# Altium PCB Coil_v3r1.PcbDoc (part 4 of 5)
Units mm, origin at the board's own origin, x right, y up, seen from the top; angles counter-clockwise.
Board outline 72 x 72 mm, 4 copper layers (Top Layer, Signal Layer 1, Signal Layer 2, Bottom Layer), stack 0.778 mm thick; 2 components, 0 nets, 15 pads, 374 vias.
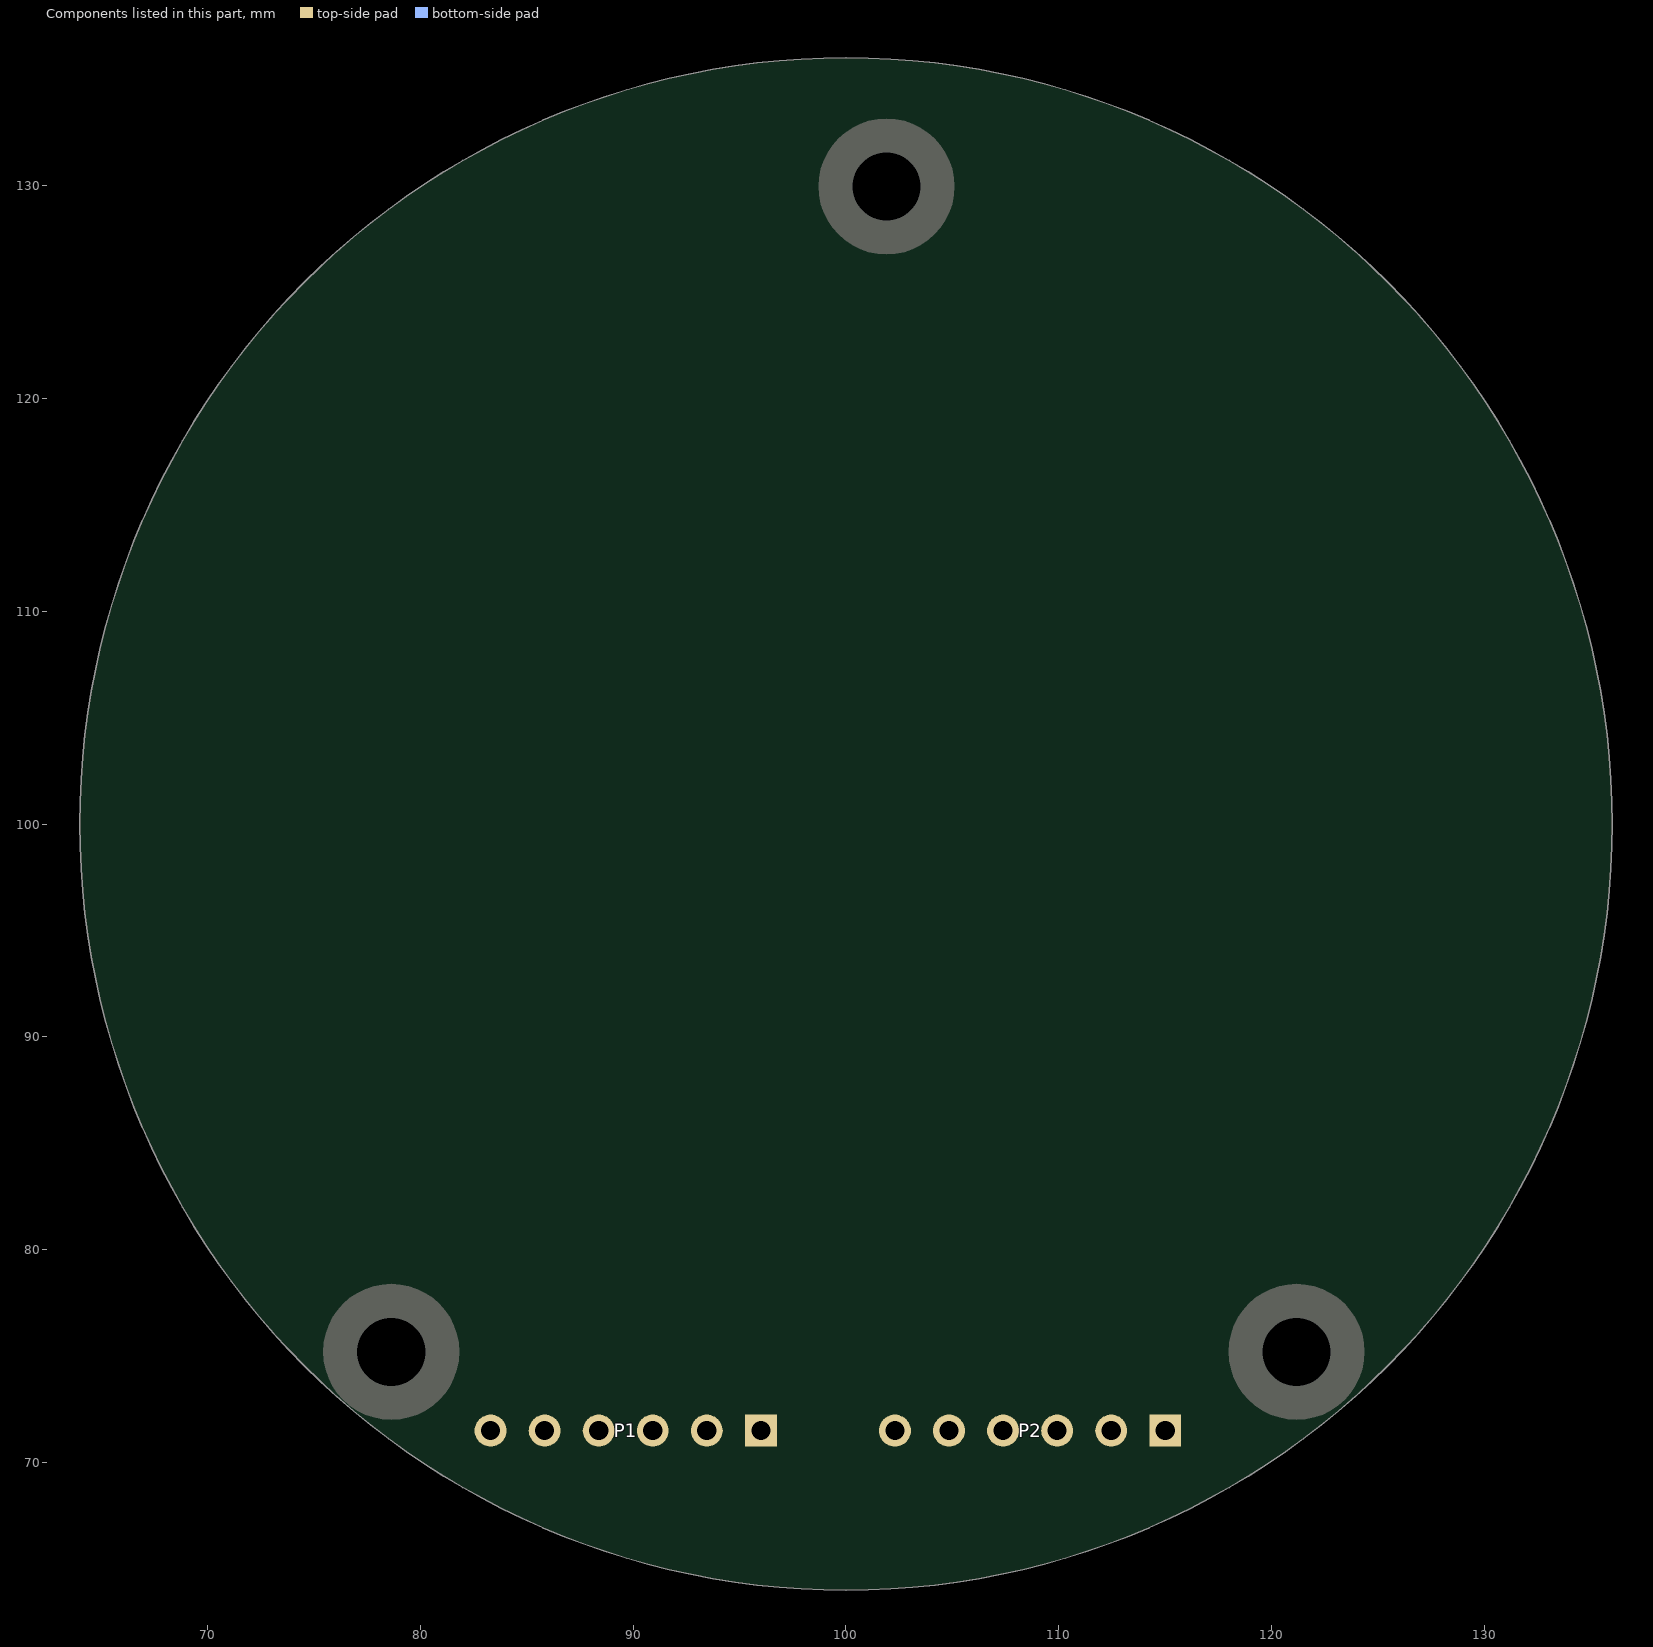
[diagram p6: the components of this part, seen from the top]

## Via types
v1: diameter 0.406, hole 0.305, Top Layer to Bottom Layer, 374 vias

## Nets (pads, with @x,y where several pads share a name; then routed paths per layer and width w, separated by ;. In a path a pad name is that pad's centre, name@x,y a point inside that pad or via, vN(x,y) a via of type N, cw(c..) or ccw(c..) an arc to the next point about the centre after c; other vN are vias at no path point) (continued)
copper on no net: (continued)
  Signal Layer 2 w0.1: v1(76.079,98.825) 76.105,98.669 76.167,98.516 76.264,98.366 76.396,98.22 76.561,98.078 76.757,97.941 76.982,97.809 77.235,97.683 77.511,97.562 77.809,97.447 78.125,97.338 78.455,97.235 78.797,97.138 79.146,97.046 79.499,96.959 79.853,96.877 80.203,96.798 80.546,96.723 80.878,96.65 81.196,96.579 81.497,96.508 81.778,96.437 82.036,96.366 82.268,96.291 82.472,96.214 82.647,96.133 82.79,96.047 82.902,95.954 82.98,95.855 v1(83.024,95.748) ; v1(76.079,101.175) 76.089,101.018 76.136,100.859 76.218,100.701 76.335,100.542 76.485,100.385 76.667,100.229 76.878,100.076 77.117,99.925 77.38,99.778 77.665,99.635 77.969,99.495 78.288,99.36 78.618,99.23 78.957,99.104 79.3,98.983 79.644,98.866 79.984,98.754 80.318,98.645 80.642,98.54 80.951,98.438 81.244,98.338 81.516,98.241 81.766,98.144 81.99,98.047 82.185,97.951 82.351,97.853 82.486,97.752 82.587,97.65 82.655,97.543 v1(82.689,97.432) ; v1(76.309,96.486) 76.35,96.334 76.427,96.187 76.538,96.048 76.684,95.915 76.862,95.79 77.071,95.673 77.308,95.563 77.571,95.462 77.858,95.369 78.166,95.284 78.491,95.207 78.83,95.137 79.179,95.073 79.536,95.016 79.896,94.964 80.256,94.917 80.612,94.873 80.961,94.832 81.298,94.792 81.622,94.752 81.929,94.711 82.215,94.668 82.478,94.622 82.717,94.571 82.928,94.515 83.109,94.451 83.261,94.379 83.381,94.298 83.468,94.207 v1(83.523,94.104) ; v1(76.309,103.514) 76.304,103.357 76.335,103.194 76.401,103.028 76.502,102.859 76.636,102.688 76.802,102.515 76.997,102.342 77.22,102.168 77.468,101.996 77.737,101.825 78.026,101.657 78.33,101.492 78.646,101.329 78.97,101.171 79.3,101.017 79.631,100.867 79.959,100.722 80.28,100.581 80.592,100.445 80.89,100.313 81.172,100.185 81.433,100.061 81.672,99.94 81.885,99.822 82.07,99.707 82.226,99.593 82.35,99.48 82.441,99.368 82.498,99.255 v1(82.521,99.141) ; v1(76.768,94.181) 76.823,94.033 76.914,93.895 77.039,93.767 77.197,93.649 77.386,93.542 77.605,93.446 77.852,93.361 78.124,93.286 78.419,93.221 78.733,93.167 79.064,93.122 79.408,93.085 79.763,93.056 80.123,93.034 80.486,93.018 80.849,93.006 81.208,92.997 81.559,92.99 81.899,92.984 82.225,92.976 82.534,92.965 82.823,92.951 83.09,92.931 83.332,92.903 83.547,92.868 83.735,92.822 83.892,92.765 84.02,92.696 84.116,92.614 v1(84.18,92.518) ; v1(76.768,105.819) 76.747,105.663 76.762,105.499 76.812,105.327 76.896,105.149 77.012,104.965 77.16,104.777 77.338,104.585 77.542,104.391 77.772,104.195 78.023,103.999 78.294,103.803 78.58,103.608 78.879,103.416 79.187,103.227 79.499,103.041 79.814,102.859 80.126,102.683 80.432,102.511 80.729,102.345 81.013,102.184 81.28,102.029 81.528,101.88 81.754,101.737 81.955,101.599 82.128,101.465 82.272,101.337 82.384,101.213 82.463,101.092 82.509,100.974 v1(82.521,100.859) ; v1(77.45,91.931) 77.52,91.79 77.624,91.662 77.76,91.546 77.929,91.445 78.128,91.357 78.355,91.283 78.61,91.222 78.888,91.174 79.187,91.139 79.505,91.115 79.839,91.103 80.185,91.1 80.541,91.106 80.902,91.12 81.265,91.139 81.627,91.163 81.985,91.189 82.335,91.216 82.674,91.243 82.999,91.267 83.308,91.287 83.597,91.301 83.864,91.307 84.108,91.304 84.326,91.289 84.517,91.262 84.679,91.221 84.812,91.165 84.916,91.093 v1(84.99,91.003) ; v1(77.45,108.069) 77.414,107.915 77.413,107.75 77.446,107.574 77.511,107.388 77.609,107.194 77.738,106.992 77.896,106.784 78.081,106.571 78.29,106.354 78.521,106.134 78.771,105.912 79.037,105.691 79.316,105.47 79.603,105.251 79.896,105.036 80.191,104.824 80.484,104.618 80.772,104.417 81.051,104.222 81.318,104.035 81.569,103.855 81.802,103.682 82.012,103.517 82.198,103.36 82.358,103.21 82.488,103.068 82.588,102.933 82.655,102.805 82.689,102.684 v1(82.689,102.568) ; v1(78.349,89.76) 78.433,89.626 78.549,89.508 78.696,89.407 78.874,89.323 79.08,89.255 79.314,89.203 79.573,89.167 79.854,89.147 80.156,89.141 80.475,89.149 80.808,89.17 81.153,89.201 81.506,89.242 81.864,89.29 82.224,89.345 82.582,89.404 82.935,89.466 83.281,89.527 83.616,89.587 83.937,89.643 84.242,89.693 84.528,89.735 84.794,89.767 85.037,89.788 85.255,89.795 85.448,89.787 85.613,89.762 85.751,89.719 85.862,89.657 v1(85.944,89.575) ; v1(78.349,110.24) 78.299,110.091 78.281,109.926 78.297,109.748 78.344,109.557 78.422,109.354 78.531,109.141 78.667,108.918 78.83,108.688 79.017,108.451 79.226,108.209 79.453,107.965 79.696,107.718 79.951,107.471 80.216,107.225 80.486,106.982 80.759,106.743 81.031,106.508 81.298,106.28 81.557,106.059 81.804,105.847 82.036,105.643 82.25,105.448 82.444,105.263 82.613,105.088 82.757,104.924 82.873,104.77 82.959,104.626 83.013,104.492 83.036,104.368 v1(83.024,104.252) ; v1(79.457,87.687) 79.554,87.562 79.68,87.456 79.837,87.37 80.022,87.303 80.234,87.256 80.472,87.227 80.733,87.217 81.015,87.225 81.316,87.249 81.633,87.288 81.962,87.341 82.302,87.406 82.65,87.481 83.001,87.564 83.354,87.654 83.704,87.748 84.05,87.844 84.388,87.939 84.715,88.031 85.029,88.119 85.328,88.198 85.609,88.268 85.87,88.326 86.11,88.37 86.326,88.399 86.519,88.409 86.686,88.401 86.828,88.372 86.944,88.321 v1(87.033,88.248) ; v1(79.457,112.313) 79.392,112.169 79.359,112.007 79.357,111.829 79.385,111.634 79.443,111.424 79.53,111.201 79.644,110.966 79.784,110.721 79.947,110.467 80.13,110.206 80.332,109.94 80.55,109.671 80.78,109.4 81.019,109.13 81.265,108.861 81.513,108.596 81.76,108.336 82.004,108.083 82.239,107.838 82.464,107.602 82.675,107.376 82.87,107.161 83.044,106.959 83.196,106.768 83.323,106.59 83.423,106.426 83.494,106.274 83.536,106.135 83.545,106.009 v1(83.523,105.896) ; v1(80.763,85.733) 80.871,85.618 81.008,85.525 81.172,85.455 81.363,85.406 81.579,85.38 81.818,85.375 82.079,85.39 82.359,85.425 82.656,85.479 82.967,85.549 83.29,85.634 83.622,85.731 83.96,85.84 84.302,85.958 84.644,86.082 84.984,86.21 85.318,86.339 85.645,86.467 85.962,86.591 86.266,86.708 86.556,86.817 86.828,86.914 87.082,86.998 87.316,87.065 87.529,87.114 87.72,87.144 87.887,87.152 88.031,87.137 88.151,87.098 v1(88.248,87.033) ; v1(80.763,114.267) 80.684,114.13 80.635,113.973 80.615,113.795 80.625,113.598 80.662,113.384 80.727,113.154 80.817,112.909 80.932,112.651 81.069,112.382 81.226,112.105 81.402,111.82 81.592,111.531 81.794,111.239 82.006,110.946 82.224,110.655 82.444,110.367 82.665,110.084 82.882,109.808 83.093,109.541 83.294,109.284 83.482,109.039 83.654,108.806 83.808,108.587 83.94,108.383 84.049,108.193 84.133,108.02 84.189,107.862 84.216,107.72 84.214,107.593 v1(84.18,107.482) ; v1(82.254,83.916) 82.373,83.812 82.518,83.733 82.688,83.679 82.883,83.65 83.1,83.645 83.339,83.663 83.597,83.704 83.872,83.766 84.163,83.849 84.466,83.949 84.779,84.065 85.099,84.195 85.425,84.336 85.754,84.487 86.082,84.644 86.407,84.804 86.728,84.966 87.041,85.125 87.344,85.279 87.635,85.426 87.912,85.563 88.174,85.686 88.419,85.794 88.645,85.884 88.852,85.954 89.039,86.002 89.205,86.026 89.349,86.025 89.473,85.998 v1(89.575,85.944) ; v1(82.254,116.084) 82.163,115.956 82.098,115.804 82.061,115.629 82.051,115.432 82.067,115.215 82.109,114.979 82.175,114.727 82.264,114.459 82.374,114.178 82.503,113.886 82.65,113.586 82.81,113.28 82.983,112.969 83.165,112.657 83.354,112.346 83.545,112.038 83.737,111.735 83.926,111.439 84.11,111.152 84.284,110.877 84.447,110.614 84.596,110.366 84.727,110.133 84.839,109.916 84.929,109.717 84.995,109.536 85.036,109.374 85.049,109.23 85.034,109.104 v1(84.99,108.997) ; v1(83.916,82.254) 84.044,82.163 84.196,82.098 84.371,82.061 84.568,82.051 84.785,82.067 85.021,82.109 85.273,82.175 85.541,82.264 85.822,82.374 86.114,82.503 86.414,82.65 86.72,82.81 87.031,82.983 87.343,83.165 87.654,83.354 87.962,83.545 88.265,83.737 88.561,83.926 88.848,84.11 89.123,84.284 89.386,84.447 89.634,84.596 89.867,84.727 90.084,84.839 90.283,84.929 90.464,84.995 90.626,85.036 90.77,85.049 90.896,85.034 v1(91.003,84.99) ; v1(83.916,117.746) 83.812,117.627 83.733,117.482 83.679,117.312 83.65,117.117 83.645,116.9 83.663,116.661 83.704,116.403 83.766,116.128 83.849,115.837 83.949,115.534 84.065,115.221 84.195,114.901 84.336,114.575 84.487,114.246 84.644,113.918 84.804,113.593 84.966,113.272 85.125,112.959 85.279,112.656 85.426,112.365 85.563,112.088 85.686,111.826 85.794,111.581 85.884,111.355 85.954,111.148 86.002,110.961 86.026,110.795 86.025,110.651 85.998,110.527 v1(85.944,110.425) ; v1(85.733,80.763) 85.87,80.684 86.027,80.635 86.205,80.615 86.402,80.625 86.616,80.662 86.846,80.727 87.091,80.817 87.349,80.932 87.618,81.069 87.895,81.226 88.18,81.402 88.469,81.592 88.761,81.794 89.054,82.006 89.345,82.224 89.633,82.444 89.916,82.665 90.192,82.882 90.459,83.093 90.716,83.294 90.961,83.482 91.194,83.654 91.413,83.808 91.617,83.94 91.807,84.049 91.98,84.133 92.138,84.189 92.28,84.216 92.407,84.214 v1(92.518,84.18) ; v1(85.733,119.237) 85.618,119.129 85.525,118.992 85.455,118.828 85.406,118.637 85.38,118.421 85.375,118.182 85.39,117.921 85.425,117.641 85.479,117.344 85.549,117.033 85.634,116.71 85.731,116.378 85.84,116.04 85.958,115.698 86.082,115.356 86.21,115.016 86.339,114.682 86.467,114.355 86.591,114.038 86.708,113.734 86.817,113.444 86.914,113.172 86.998,112.918 87.065,112.684 87.114,112.471 87.144,112.28 87.152,112.113 87.137,111.969 87.098,111.849 v1(87.033,111.752) ; 85.84,71.5 85.84,73.113 86.768,74.041 97.989,74.041 98.815,74.867 98.815,76.079 ; v1(86.269,99.28) 86.291,99.186 86.348,99.093 86.439,99.004 86.564,98.919 86.719,98.838 86.905,98.762 87.119,98.692 87.358,98.627 87.621,98.568 87.903,98.515 88.203,98.468 88.517,98.427 88.841,98.392 89.171,98.362 89.506,98.338 89.84,98.318 90.17,98.302 90.493,98.289 90.806,98.279 91.104,98.271 91.385,98.263 91.646,98.255 91.885,98.245 92.098,98.234 92.284,98.219 92.441,98.199 92.568,98.175 92.663,98.143 92.726,98.105 v1(92.756,98.059) ; v1(86.269,100.72) 86.281,100.623 86.328,100.525 86.41,100.427 86.524,100.329 86.671,100.233 86.848,100.138 87.053,100.045 87.284,99.956 87.539,99.87 87.814,99.787 88.107,99.709 88.415,99.636 88.734,99.567 89.06,99.503 89.39,99.444 89.72,99.389 90.047,99.339 90.367,99.293 90.676,99.25 90.972,99.21 91.251,99.173 91.51,99.138 91.746,99.103 91.957,99.069 92.14,99.035 92.295,98.999 92.418,98.961 92.509,98.921 92.567,98.876 v1(92.592,98.827) ; v1(86.419,97.849) 86.452,97.757 86.518,97.671 86.618,97.592 86.75,97.52 86.914,97.456 87.106,97.4 87.326,97.352 87.571,97.313 87.838,97.282 88.125,97.258 88.428,97.243 88.744,97.235 89.07,97.234 89.402,97.239 89.737,97.25 90.071,97.265 90.402,97.284 90.724,97.305 91.036,97.328 91.333,97.35 91.614,97.372 91.875,97.391 92.113,97.407 92.326,97.417 92.513,97.422 92.671,97.419 92.799,97.408 92.897,97.387 92.964,97.355 v1(92.998,97.312) ; v1(86.419,102.151) 86.422,102.054 86.458,101.951 86.529,101.845 86.632,101.736 86.768,101.625 86.934,101.512 87.128,101.398 87.349,101.285 87.593,101.173 87.859,101.062 88.142,100.954 88.44,100.849 88.75,100.747 89.068,100.65 89.39,100.556 89.712,100.467 90.032,100.383 90.345,100.303 90.649,100.229 90.939,100.158 91.212,100.092 91.466,100.03 91.697,99.971 91.904,99.915 92.083,99.862 92.232,99.81 92.351,99.76 92.437,99.709 92.491,99.659 v1(92.51,99.607) ; v1(86.719,96.441) 86.76,96.353 86.835,96.275 86.943,96.207 87.082,96.149 87.251,96.102 87.449,96.067 87.672,96.042 87.92,96.028 88.189,96.025 88.476,96.032 88.779,96.049 89.095,96.074 89.419,96.107 89.749,96.147 90.081,96.192 90.412,96.242 90.738,96.296 91.057,96.35 91.364,96.405 91.658,96.459 91.935,96.51 92.192,96.556 92.427,96.597 92.638,96.629 92.823,96.653 92.981,96.667 93.11,96.669 93.209,96.659 93.279,96.634 v1(93.317,96.595) ; v1(86.719,103.559) 86.711,103.462 86.736,103.356 86.795,103.243 86.887,103.124 87.01,102.999 87.164,102.869 87.345,102.736 87.553,102.6 87.784,102.463 88.036,102.325 88.307,102.188 88.593,102.053 88.89,101.919 89.195,101.789 89.506,101.662 89.817,101.54 90.127,101.423 90.43,101.311 90.724,101.205 91.005,101.104 91.27,101.01 91.516,100.922 91.74,100.839 91.939,100.762 92.111,100.69 92.255,100.623 92.368,100.56 92.448,100.502 92.496,100.446 v1(92.51,100.393) ; v1(87.163,95.072) 87.214,94.989 87.297,94.919 87.411,94.862 87.555,94.82 87.728,94.791 87.929,94.776 88.154,94.775 88.401,94.787 88.669,94.812 88.954,94.849 89.254,94.897 89.565,94.955 89.884,95.022 90.208,95.096 90.533,95.176 90.857,95.261 91.176,95.348 91.487,95.435 91.787,95.522 92.074,95.606 92.344,95.686 92.595,95.759 92.824,95.824 93.031,95.878 93.212,95.922 93.368,95.952 93.496,95.967 93.596,95.967 93.667,95.95 v1(93.71,95.915) ; v1(87.163,104.928) 87.145,104.832 87.16,104.724 87.207,104.606 87.286,104.477 87.395,104.34 87.534,104.195 87.7,104.044 87.893,103.887 88.108,103.727 88.345,103.563 88.6,103.399 88.87,103.234 89.151,103.07 89.442,102.908 89.737,102.75 90.034,102.596 90.33,102.447 90.62,102.304 90.901,102.168 91.17,102.039 91.423,101.917 91.659,101.803 91.873,101.698 92.063,101.6 92.227,101.511 92.362,101.429 92.468,101.355 92.542,101.288 92.584,101.228 v1(92.592,101.173) ; v1(87.687,79.457) 87.831,79.392 87.993,79.359 88.171,79.357 88.366,79.385 88.576,79.443 88.799,79.53 89.034,79.644 89.279,79.784 89.533,79.947 89.794,80.13 90.06,80.332 90.329,80.55 90.6,80.78 90.87,81.019 91.139,81.265 91.404,81.513 91.664,81.76 91.917,82.004 92.162,82.239 92.398,82.464 92.624,82.675 92.839,82.87 93.041,83.044 93.232,83.196 93.41,83.323 93.574,83.423 93.726,83.494 93.865,83.536 93.991,83.545 v1(94.104,83.523) ; v1(87.687,120.543) 87.562,120.446 87.456,120.32 87.37,120.163 87.303,119.978 87.256,119.766 87.227,119.528 87.217,119.267 87.225,118.985 87.249,118.684 87.288,118.367 87.341,118.038 87.406,117.698 87.481,117.35 87.564,116.999 87.654,116.646 87.748,116.296 87.844,115.95 87.939,115.612 88.031,115.285 88.119,114.971 88.198,114.672 88.268,114.391 88.326,114.13 88.37,113.89 88.399,113.674 88.409,113.481 88.401,113.314 88.372,113.172 88.321,113.056 v1(88.248,112.967) ; v1(87.749,93.758) 87.808,93.68 87.897,93.619 88.017,93.575 88.165,93.547 88.34,93.537 88.541,93.543 88.765,93.566 89.01,93.604 89.274,93.656 89.553,93.723 89.846,93.802 90.149,93.892 90.459,93.992 90.774,94.1 91.089,94.213 91.402,94.331 91.711,94.451 92.011,94.571 92.3,94.688 92.576,94.802 92.837,94.909 93.078,95.008 93.3,95.096 93.5,95.172 93.676,95.234 93.827,95.281 93.953,95.309 94.052,95.32 94.125,95.31 v1(94.171,95.28) ; v1(87.749,106.242) 87.721,106.149 87.724,106.041 87.758,105.918 87.823,105.782 87.918,105.634 88.041,105.475 88.19,105.307 88.365,105.131 88.563,104.949 88.781,104.762 89.017,104.572 89.269,104.379 89.532,104.187 89.803,103.996 90.081,103.808 90.36,103.623 90.638,103.444 90.912,103.272 91.177,103.107 91.431,102.95 91.671,102.803 91.893,102.665 92.095,102.538 92.274,102.421 92.427,102.315 92.554,102.22 92.651,102.135 92.718,102.061 92.753,101.996 v1(92.756,101.941) ; 88.38,71.5 90.03,69.85 97.939,69.85 101.185,73.096 101.185,76.079 ; v1(88.468,92.511) 88.535,92.44 88.631,92.389 88.754,92.357 88.904,92.346 89.08,92.353 89.278,92.381 89.499,92.426 89.739,92.49 89.995,92.57 90.267,92.665 90.55,92.775 90.842,92.896 91.14,93.028 91.441,93.167 91.743,93.313 92.042,93.463 92.336,93.615 92.622,93.765 92.898,93.913 93.16,94.054 93.408,94.188 93.638,94.312 93.849,94.423 94.04,94.519 94.209,94.599 94.354,94.661 94.476,94.703 94.574,94.724 94.648,94.722 v1(94.697,94.697) ; v1(88.468,107.489) 88.431,107.399 88.423,107.291 88.444,107.165 88.494,107.023 88.573,106.866 88.679,106.696 88.81,106.513 88.965,106.32 89.143,106.118 89.341,105.909 89.555,105.695 89.785,105.477 90.027,105.258 90.277,105.04 90.533,104.824 90.792,104.611 91.05,104.404 91.304,104.204 91.55,104.012 91.787,103.83 92.009,103.658 92.216,103.498 92.403,103.351 92.569,103.216 92.711,103.094 92.826,102.986 92.914,102.892 92.973,102.811 93.001,102.743 v1(92.998,102.688) ; v1(89.314,91.347) 89.388,91.283 89.489,91.242 89.615,91.224 89.765,91.228 89.939,91.254 90.134,91.302 90.348,91.37 90.58,91.458 90.827,91.565 91.087,91.688 91.357,91.826 91.634,91.978 91.917,92.14 92.202,92.31 92.487,92.487 92.769,92.667 93.046,92.849 93.314,93.028 93.573,93.204 93.819,93.372 94.051,93.531 94.268,93.678 94.466,93.811 94.645,93.926 94.805,94.024 94.943,94.1 95.06,94.155 95.155,94.185 95.229,94.191 v1(95.28,94.171) ; v1(89.314,108.653) 89.267,108.568 89.248,108.461 89.256,108.334 89.291,108.187 89.353,108.023 89.44,107.842 89.552,107.647 89.686,107.438 89.842,107.219 90.017,106.99 90.208,106.755 90.414,106.515 90.631,106.272 90.857,106.029 91.089,105.787 91.324,105.548 91.559,105.316 91.791,105.09 92.016,104.873 92.232,104.668 92.436,104.474 92.624,104.293 92.795,104.126 92.946,103.975 93.074,103.839 93.178,103.72 93.255,103.616 93.305,103.53 93.326,103.459 v1(93.317,103.405) ; v1(89.575,114.056) 89.657,114.138 89.719,114.249 89.762,114.387 89.787,114.552 89.795,114.745 89.788,114.963 89.767,115.206 89.735,115.472 89.693,115.758 89.643,116.063 89.587,116.384 89.527,116.719 89.466,117.065 89.404,117.418 89.345,117.776 89.29,118.136 89.242,118.494 89.201,118.847 89.17,119.192 89.149,119.525 89.141,119.844 89.147,120.146 89.167,120.427 89.203,120.686 89.255,120.92 89.323,121.126 89.407,121.304 89.508,121.451 89.626,121.567 v1(89.76,121.651) ; v1(89.76,78.349) 89.909,78.299 90.074,78.281 90.252,78.297 90.443,78.344 90.646,78.422 90.859,78.531 91.082,78.667 91.312,78.83 91.549,79.017 91.791,79.226 92.035,79.453 92.282,79.696 92.529,79.951 92.775,80.216 93.018,80.486 93.257,80.759 93.492,81.031 93.72,81.298 93.941,81.557 94.153,81.804 94.357,82.036 94.552,82.25 94.737,82.444 94.912,82.613 95.076,82.757 95.23,82.873 95.374,82.959 95.508,83.013 95.632,83.036 v1(95.748,83.024) ; v1(90.277,90.277) 90.357,90.222 90.462,90.191 90.589,90.186 90.738,90.206 90.908,90.25 91.097,90.318 91.303,90.409 91.524,90.521 91.759,90.652 92.004,90.802 92.258,90.968 92.519,91.147 92.783,91.338 93.049,91.537 93.313,91.743 93.575,91.952 93.831,92.161 94.08,92.368 94.319,92.569 94.546,92.762 94.76,92.945 94.96,93.113 95.143,93.266 95.31,93.4 95.458,93.513 95.588,93.604 95.698,93.67 95.79,93.711 95.862,93.724 v1(95.915,93.71) ; v1(90.277,109.723) 90.222,109.643 90.191,109.538 90.186,109.411 90.206,109.262 90.25,109.092 90.318,108.903 90.409,108.697 90.521,108.476 90.652,108.241 90.802,107.996 90.968,107.742 91.147,107.481 91.338,107.217 91.537,106.951 91.743,106.687 91.952,106.425 92.161,106.169 92.368,105.92 92.569,105.681 92.762,105.454 92.945,105.24 93.113,105.04 93.266,104.857 93.4,104.69 93.513,104.542 93.604,104.412 93.67,104.302 93.711,104.21 93.724,104.138 v1(93.71,104.085) ; v1(91.003,115.01) 91.093,115.084 91.165,115.188 91.221,115.321 91.262,115.483 91.289,115.674 91.304,115.892 91.307,116.136 91.301,116.403 91.287,116.692 91.267,117.001 91.243,117.326 91.216,117.665 91.189,118.015 91.163,118.373 91.139,118.735 91.12,119.098 91.106,119.459 91.1,119.815 91.103,120.161 91.115,120.495 91.139,120.813 91.174,121.112 91.222,121.39 91.283,121.645 91.357,121.872 91.445,122.071 91.546,122.24 91.662,122.376 91.79,122.48 v1(91.931,122.55) ; v1(91.347,89.314) 91.432,89.267 91.539,89.248 91.666,89.256 91.813,89.291 91.977,89.353 92.158,89.44 92.353,89.552 92.562,89.686 92.781,89.842 93.01,90.017 93.245,90.208 93.485,90.414 93.728,90.631 93.971,90.857 94.213,91.089 94.452,91.324 94.684,91.559 94.91,91.791 95.127,92.016 95.332,92.232 95.526,92.436 95.707,92.624 95.874,92.795 96.025,92.946 96.161,93.074 96.28,93.178 96.384,93.255 96.47,93.305 96.541,93.326 v1(96.595,93.317) ; v1(91.347,110.686) 91.283,110.612 91.242,110.511 91.224,110.385 91.228,110.235 91.254,110.061 91.302,109.866 91.37,109.652 91.458,109.42 91.565,109.173 91.688,108.913 91.826,108.643 91.978,108.366 92.14,108.083 92.31,107.798 92.487,107.513 92.667,107.231 92.849,106.954 93.028,106.686 93.204,106.427 93.372,106.181 93.531,105.949 93.678,105.732 93.811,105.534 93.926,105.355 94.024,105.195 94.1,105.057 94.155,104.94 94.185,104.845 94.191,104.771 v1(94.171,104.72) ; v1(91.931,77.45) 92.085,77.414 92.25,77.413 92.426,77.446 92.612,77.511 92.806,77.609 93.008,77.738 93.216,77.896 93.429,78.081 93.646,78.29 93.866,78.521 94.088,78.771 94.309,79.037 94.53,79.316 94.749,79.603 94.964,79.896 95.176,80.191 95.382,80.484 95.583,80.772 95.778,81.051 95.965,81.318 96.145,81.569 96.318,81.802 96.483,82.012 96.64,82.198 96.79,82.358 96.932,82.488 97.067,82.588 97.195,82.655 97.316,82.689 v1(97.432,82.689) ; v1(92.511,88.468) 92.601,88.431 92.709,88.423 92.835,88.444 92.977,88.494 93.134,88.573 93.304,88.679 93.487,88.81 93.68,88.965 93.882,89.143 94.091,89.341 94.305,89.555 94.523,89.785 94.742,90.027 94.96,90.277 95.176,90.533 95.389,90.792 95.596,91.05 95.796,91.304 95.988,91.55 96.17,91.787 96.342,92.009 96.502,92.216 96.649,92.403 96.784,92.569 96.906,92.711 97.014,92.826 97.108,92.914 97.189,92.973 97.257,93.001 v1(97.312,92.998) ; v1(92.511,111.532) 92.44,111.465 92.389,111.369 92.357,111.246 92.346,111.096 92.353,110.92 92.381,110.722 92.426,110.501 92.49,110.261 92.57,110.005 92.665,109.733 92.775,109.45 92.896,109.158 93.028,108.86 93.167,108.559 93.313,108.257 93.463,107.958 93.615,107.664 93.765,107.378 93.913,107.102 94.054,106.84 94.188,106.592 94.312,106.362 94.423,106.151 94.519,105.96 94.599,105.791 94.661,105.646 94.703,105.524 94.724,105.426 94.722,105.352 v1(94.697,105.303) ; v1(92.518,115.82) 92.614,115.884 92.696,115.98 92.765,116.108 92.822,116.265 92.868,116.453 92.903,116.668 92.931,116.91 92.951,117.177 92.965,117.466 92.976,117.775 92.984,118.101 92.99,118.441 92.997,118.792 93.006,119.151 93.018,119.513 93.034,119.877 93.056,120.237 93.085,120.592 93.122,120.936 93.167,121.267 93.221,121.581 93.286,121.876 93.361,122.148 93.446,122.395 93.542,122.614 93.649,122.803 93.767,122.961 93.895,123.086 94.033,123.177 v1(94.181,123.232) ; v1(93.758,87.749) 93.851,87.721 93.959,87.724 94.082,87.758 94.218,87.823 94.366,87.918 94.525,88.041 94.693,88.19 94.869,88.365 95.051,88.563 95.238,88.781 95.428,89.017 95.621,89.269 95.813,89.532 96.004,89.803 96.192,90.081 96.377,90.36 96.556,90.638 96.728,90.912 96.893,91.177 97.05,91.431 97.197,91.671 97.335,91.893 97.462,92.095 97.579,92.274 97.685,92.427 97.78,92.554 97.865,92.651 97.939,92.718 98.004,92.753 v1(98.059,92.756) ; v1(93.758,112.251) 93.68,112.192 93.619,112.103 93.575,111.983 93.547,111.835 93.537,111.66 93.543,111.459 93.566,111.235 93.604,110.99 93.656,110.726 93.723,110.447 93.802,110.154 93.892,109.851 93.992,109.541 94.1,109.226 94.213,108.911 94.331,108.598 94.451,108.289 94.571,107.989 94.688,107.7 94.802,107.424 94.909,107.163 95.008,106.922 95.096,106.7 95.172,106.5 95.234,106.324 95.281,106.173 95.309,106.047 95.32,105.948 95.31,105.875 v1(95.28,105.829) ; v1(94.104,116.477) 94.207,116.532 94.298,116.619 94.379,116.739 94.451,116.891 94.515,117.072 94.571,117.283 94.622,117.522 94.668,117.785 94.711,118.071 94.752,118.378 94.792,118.702 94.832,119.039 94.873,119.388 94.917,119.744 94.964,120.104 95.016,120.464 95.073,120.821 95.137,121.17 95.207,121.509 95.284,121.834 95.369,122.142 95.462,122.429 95.563,122.692 95.673,122.929 95.79,123.138 95.915,123.316 96.048,123.462 96.187,123.573 96.334,123.65 v1(96.486,123.691) ; v1(94.181,76.768) 94.337,76.747 94.501,76.762 94.673,76.812 94.851,76.896 95.035,77.012 95.223,77.16 95.415,77.338 95.609,77.542 95.805,77.772 96.001,78.023 96.197,78.294 96.392,78.58 96.584,78.879 96.773,79.187 96.959,79.499 97.141,79.814 97.317,80.126 97.489,80.432 97.655,80.729 97.816,81.013 97.971,81.28 98.12,81.528 98.263,81.754 98.401,81.955 98.535,82.128 98.663,82.272 98.787,82.384 98.908,82.463 99.026,82.509 v1(99.141,82.521) ; v1(95.072,87.163) 95.168,87.145 95.276,87.16 95.394,87.207 95.523,87.286 95.66,87.395 95.805,87.534 95.956,87.7 96.113,87.893 96.273,88.108 96.437,88.345 96.601,88.6 96.766,88.87 96.93,89.151 97.092,89.442 97.25,89.737 97.404,90.034 97.553,90.33 97.696,90.62 97.832,90.901 97.961,91.17 98.083,91.423 98.197,91.659 98.302,91.873 98.4,92.063 98.489,92.227 98.571,92.362 98.645,92.468 98.712,92.542 98.772,92.584 v1(98.827,92.592) ; v1(95.072,112.837) 94.989,112.786 94.919,112.703 94.862,112.589 94.82,112.445 94.791,112.272 94.776,112.071 94.775,111.846 94.787,111.599 94.812,111.331 94.849,111.046 94.897,110.746 94.955,110.435 95.022,110.116 95.096,109.792 95.176,109.467 95.261,109.143 95.348,108.824 95.435,108.513 95.522,108.213 95.606,107.926 95.686,107.656 95.759,107.405 95.824,107.176 95.878,106.969 95.922,106.788 95.952,106.632 95.967,106.504 95.967,106.404 95.95,106.333 v1(95.915,106.29) ; v1(95.748,116.976) 95.855,117.02 95.954,117.098 96.047,117.21 96.133,117.353 96.214,117.528 96.291,117.732 96.366,117.964 96.437,118.222 96.508,118.503 96.579,118.804 96.65,119.122 96.723,119.454 96.798,119.797 96.877,120.147 96.959,120.501 97.046,120.854 97.138,121.203 97.235,121.545 97.338,121.875 97.447,122.191 97.562,122.489 97.683,122.765 97.809,123.018 97.941,123.243 98.078,123.439 98.22,123.604 98.366,123.736 98.516,123.833 98.669,123.895 v1(98.825,123.921) ; v1(96.441,86.719) 96.538,86.711 96.644,86.736 96.757,86.795 96.876,86.887 97.001,87.01 97.131,87.164 97.264,87.345 97.4,87.553 97.537,87.784 97.675,88.036 97.812,88.307 97.947,88.593 98.081,88.89 98.211,89.195 98.338,89.506 98.46,89.817 98.577,90.127 98.689,90.43 98.795,90.724 98.896,91.005 98.99,91.27 99.078,91.516 99.161,91.74 99.238,91.939 99.31,92.111 99.377,92.255 99.44,92.368 99.498,92.448 99.554,92.496 v1(99.607,92.51) ; v1(96.441,113.281) 96.353,113.24 96.275,113.165 96.207,113.057 96.149,112.918 96.102,112.749 96.067,112.551 96.042,112.328 96.028,112.08 96.025,111.811 96.032,111.524 96.049,111.221 96.074,110.905 96.107,110.581 96.147,110.251 96.192,109.919 96.242,109.588 96.296,109.262 96.35,108.943 96.405,108.636 96.459,108.342 96.51,108.065 96.556,107.808 96.597,107.573 96.629,107.362 96.653,107.177 96.667,107.019 96.669,106.89 96.659,106.791 96.634,106.721 v1(96.595,106.683) ; v1(96.486,76.309) 96.643,76.304 96.806,76.335 96.972,76.401 97.141,76.502 97.312,76.636 97.485,76.802 97.658,76.997 97.832,77.22 98.004,77.468 98.175,77.737 98.343,78.026 98.508,78.33 98.671,78.646 98.829,78.97 98.983,79.3 99.133,79.631 99.278,79.959 99.419,80.28 99.555,80.592 99.687,80.89 99.815,81.172 99.939,81.433 100.06,81.672 100.178,81.885 100.293,82.07 100.407,82.226 100.52,82.35 100.632,82.441 100.745,82.498 v1(100.859,82.521) ; v1(97.312,107.002) 97.355,107.036 97.387,107.103 97.408,107.201 97.419,107.329 97.422,107.487 97.417,107.674 97.407,107.887 97.391,108.125 97.372,108.386 97.35,108.667 97.328,108.964 97.305,109.276 97.284,109.598 97.265,109.929 97.25,110.263 97.239,110.598 97.234,110.93 97.235,111.256 97.243,111.572 97.258,111.875 97.282,112.162 97.313,112.429 97.352,112.674 97.4,112.894 97.456,113.086 97.52,113.25 97.592,113.382 97.671,113.482 97.757,113.548 v1(97.849,113.581) ; v1(97.432,117.311) 97.543,117.345 97.65,117.413 97.752,117.514 97.853,117.649 97.951,117.815 98.047,118.01 98.144,118.234 98.241,118.484 98.338,118.756 98.438,119.049 98.54,119.358 98.645,119.682 98.754,120.016 98.866,120.356 98.983,120.7 99.104,121.043 99.23,121.382 99.36,121.712 99.495,122.031 99.635,122.335 99.778,122.62 99.925,122.883 100.076,123.122 100.229,123.333 100.385,123.515 100.542,123.665 100.701,123.782 100.859,123.864 101.018,123.911 v1(101.175,123.921) ; v1(97.849,86.419) 97.946,86.422 98.049,86.458 98.155,86.529 98.264,86.632 98.375,86.768 98.488,86.934 98.602,87.128 98.715,87.349 98.827,87.593 98.938,87.859 99.046,88.142 99.151,88.44 99.253,88.75 99.35,89.068 99.444,89.39 99.533,89.712 99.617,90.032 99.697,90.345 99.771,90.649 99.842,90.939 99.908,91.212 99.97,91.466 100.029,91.697 100.085,91.904 100.138,92.083 100.19,92.232 100.24,92.351 100.291,92.437 100.341,92.491 v1(100.393,92.51) ; v1(98.059,107.244) 98.105,107.274 98.143,107.337 98.175,107.432 98.199,107.559 98.219,107.716 98.234,107.902 98.245,108.115 98.255,108.354 98.263,108.615 98.271,108.896 98.279,109.194 98.289,109.507 98.302,109.83 98.318,110.16 98.338,110.494 98.362,110.829 98.392,111.159 98.427,111.483 98.468,111.797 98.515,112.097 98.568,112.379 98.627,112.642 98.692,112.881 98.762,113.095 98.838,113.281 98.919,113.436 99.004,113.561 99.093,113.652 99.186,113.709 v1(99.28,113.731) ; 98.825,76.079 98.982,76.089 99.141,76.136 99.299,76.218 99.458,76.335 99.615,76.485 99.771,76.667 99.924,76.878 100.075,77.117 100.222,77.38 100.365,77.665 100.505,77.969 100.64,78.288 100.77,78.618 100.896,78.957 101.017,79.3 101.134,79.644 101.246,79.984 101.355,80.318 101.46,80.642 101.562,80.951 101.662,81.244 101.759,81.516 101.856,81.766 101.953,81.99 102.049,82.185 102.147,82.351 102.248,82.486 102.35,82.587 102.457,82.655 v1(102.568,82.689) ; v1(98.827,107.408) 98.876,107.433 98.921,107.491 98.961,107.582 98.999,107.705 99.035,107.86 99.069,108.043 99.103,108.254 99.138,108.49 99.173,108.749 99.21,109.028 99.25,109.324 99.293,109.633 99.339,109.953 99.389,110.28 99.444,110.61 99.503,110.94 99.567,111.266 99.636,111.585 99.709,111.893 99.787,112.186 99.87,112.461 99.956,112.716 100.045,112.947 100.138,113.152 100.233,113.329 100.329,113.476 100.427,113.59 100.525,113.672 100.623,113.719 v1(100.72,113.731) ; v1(99.141,117.479) 99.188,117.484 99.235,117.495 99.281,117.512 99.328,117.535 99.374,117.563 99.42,117.597 99.466,117.637 99.513,117.683 99.559,117.734 99.605,117.79 99.652,117.852 99.699,117.918 99.746,117.99 99.794,118.067 99.842,118.149 99.89,118.235 99.939,118.326 99.988,118.421 100.038,118.52 100.088,118.623 100.139,118.73 100.19,118.841 100.243,118.954 100.295,119.071 100.349,119.191 100.403,119.314 100.458,119.439 100.514,119.566 100.57,119.695 v1(100.627,119.826) ; v1(99.607,107.49) 99.629,107.494 99.651,107.504 99.672,107.52 99.693,107.541 99.714,107.569 99.735,107.602 99.755,107.641 99.776,107.685 99.797,107.735 99.819,107.791 99.84,107.851 99.862,107.917 99.884,107.989 99.906,108.065 99.929,108.145 99.952,108.231 99.976,108.321 100,108.415 100.025,108.514 100.05,108.616 100.076,108.722 100.103,108.832 100.13,108.945 100.158,109.061 100.187,109.18 100.217,109.302 100.247,109.426 100.278,109.552 100.31,109.68 100.343,109.81 v1(100.399,111.427) ; v1(100.06,83.222) cw(c100.06,84.023) 99.259,84.023 99.259,85.869 99.28,86.269 99.377,86.281 99.475,86.328 99.573,86.41 99.671,86.524 99.767,86.671 99.862,86.848 99.955,87.053 100.044,87.284 100.13,87.539 100.213,87.814 100.291,88.107 100.364,88.415 100.433,88.734 100.497,89.06 100.556,89.39 100.611,89.72 100.661,90.047 100.707,90.367 100.75,90.676 100.79,90.972 100.827,91.251 100.862,91.51 100.897,91.746 100.931,91.957 100.965,92.14 101.001,92.295 101.039,92.418 101.079,92.509 101.124,92.567 v1(101.173,92.592) ; v1(100.393,107.49) 100.414,107.492 100.437,107.499 100.459,107.513 100.483,107.532 100.506,107.557 100.531,107.588 100.555,107.624 100.581,107.666 100.607,107.714 100.634,107.767 100.662,107.825 100.69,107.889 100.719,107.957 100.75,108.03 100.781,108.108 100.813,108.191 100.846,108.278 100.88,108.369 100.915,108.465 100.95,108.564 100.987,108.667 101.025,108.773 101.064,108.882 101.104,108.995 101.146,109.11 101.188,109.228 101.231,109.348 101.275,109.471 101.32,109.595 101.366,109.721 v1(101.591,111.323) ; v1(100.685,109.792) 100.798,111.406 100.84,111.534 100.884,111.66 100.927,111.784 100.972,111.906 101.017,112.025 101.062,112.141 101.108,112.254 101.154,112.364 101.201,112.47 101.247,112.572 101.294,112.67 101.342,112.764 101.389,112.854 101.436,112.939 101.483,113.02 101.531,113.096 101.578,113.166 101.625,113.232 101.671,113.292 101.718,113.347 101.764,113.397 101.809,113.44 101.854,113.478 101.899,113.511 101.943,113.537 101.986,113.558 102.028,113.573 102.07,113.581 102.111,113.584 v1(102.151,113.581) ; v1(100.859,117.479) 100.906,117.48 100.953,117.486 101.001,117.498 101.05,117.516 101.098,117.54 101.148,117.57 101.198,117.605 101.248,117.645 101.299,117.691 101.351,117.743 101.403,117.8 101.457,117.862 101.511,117.928 101.566,118 101.621,118.077 101.678,118.158 101.735,118.244 101.794,118.333 101.853,118.427 101.913,118.525 101.974,118.626 102.036,118.731 102.099,118.839 102.163,118.951 102.228,119.065 102.294,119.181 102.361,119.3 102.429,119.421 102.498,119.544 v1(102.568,119.669) ; v1(101.173,107.408) 101.228,107.416 101.288,107.458 101.355,107.532 101.429,107.638 101.511,107.773 101.6,107.937 101.698,108.127 101.803,108.341 101.917,108.577 102.039,108.83 102.168,109.099 102.304,109.38 102.447,109.67 102.596,109.966 102.75,110.263 102.908,110.558 103.07,110.849 103.234,111.13 103.399,111.4 103.563,111.655 103.727,111.892 103.887,112.107 104.044,112.3 104.195,112.466 104.34,112.605 104.477,112.714 104.606,112.793 104.724,112.84 104.832,112.855 v1(104.928,112.837) ; 101.175,76.079 101.331,76.105 101.484,76.167 101.634,76.264 101.78,76.396 101.922,76.561 102.059,76.757 102.191,76.982 102.317,77.235 102.438,77.511 102.553,77.809 102.662,78.125 102.765,78.455 102.862,78.797 102.954,79.146 103.041,79.499 103.123,79.853 103.202,80.203 103.277,80.546 103.35,80.878 103.421,81.196 103.492,81.497 103.563,81.778 103.634,82.036 103.709,82.268 103.786,82.472 103.867,82.647 103.953,82.79 104.046,82.902 104.145,82.98 v1(104.252,83.024) ; v1(101.437,121.566) 101.504,121.694 101.572,121.821 101.64,121.945 101.709,122.066 101.778,122.184 101.848,122.3 101.918,122.412 101.988,122.521 102.059,122.626 102.13,122.727 102.201,122.824 102.272,122.917 102.344,123.005 102.415,123.089 102.486,123.168 102.557,123.241 102.628,123.31 102.699,123.374 102.77,123.432 102.84,123.485 102.91,123.532 102.98,123.573 103.049,123.609 103.117,123.638 103.185,123.662 103.253,123.68 103.319,123.692 103.385,123.698 103.45,123.697 v1(103.514,123.691) ; v1(101.705,109.667) 101.985,111.406 ; v1(101.941,92.756) 101.895,92.726 101.857,92.663 101.825,92.568 101.801,92.441 101.781,92.284 101.766,92.098 101.755,91.885 101.745,91.646 101.737,91.385 101.729,91.104 101.721,90.806 101.711,90.493 101.698,90.17 101.682,89.84 101.662,89.506 101.638,89.171 101.608,88.841 101.573,88.517 101.532,88.203 101.485,87.903 101.432,87.621 101.373,87.358 101.308,87.119 101.238,86.905 101.162,86.719 101.081,86.564 100.996,86.439 100.907,86.348 100.814,86.291 100.72,86.269 100.741,85.869 ccw(c102.041,85.869) 102.041,84.568 v1(102.895,84.568) ; v1(101.941,107.244) 101.996,107.247 102.061,107.282 102.135,107.349 102.22,107.446 102.315,107.573 102.421,107.726 102.538,107.905 102.665,108.107 102.803,108.329 102.95,108.569 103.107,108.823 103.272,109.088 103.444,109.362 103.623,109.64 103.808,109.919 103.996,110.197 104.187,110.468 104.379,110.731 104.572,110.983 104.762,111.219 104.949,111.437 105.131,111.635 105.307,111.81 105.475,111.959 105.634,112.082 105.782,112.177 105.918,112.242 106.041,112.276 106.149,112.279 v1(106.242,112.251) ; 101.985,111.26 102.041,111.383 102.098,111.504 102.154,111.623 102.211,111.739 102.268,111.853 102.325,111.964 102.383,112.071 102.44,112.175 102.498,112.276 102.555,112.373 102.612,112.466 102.668,112.554 102.725,112.639 102.781,112.718 102.836,112.794 102.891,112.864 102.945,112.929 102.999,112.99 103.052,113.045 103.103,113.094 103.154,113.139 103.204,113.178 103.253,113.211 103.301,113.238 103.347,113.26 103.392,113.276 103.436,113.286 103.478,113.29 103.519,113.289 v1(103.559,113.281) ; v1(102.151,86.419) 102.243,86.452 102.329,86.518 102.408,86.618 102.48,86.75 102.544,86.914 102.6,87.106 102.648,87.326 102.687,87.571 102.718,87.838 102.742,88.125 102.757,88.428 102.765,88.744 102.766,89.07 102.761,89.402 102.75,89.737 102.735,90.071 102.716,90.402 102.695,90.724 102.672,91.036 102.65,91.333 102.628,91.614 102.609,91.875 102.593,92.113 102.583,92.326 102.578,92.513 102.581,92.671 102.592,92.799 102.613,92.897 102.645,92.964 v1(102.688,92.998) ; v1(102.568,117.311) 102.684,117.311 102.805,117.345 102.933,117.412 103.068,117.512 103.21,117.642 103.36,117.802 103.517,117.988 103.682,118.198 103.855,118.431 104.035,118.682 104.222,118.949 104.417,119.228 104.618,119.516 104.824,119.809 105.036,120.104 105.251,120.397 105.47,120.684 105.691,120.963 105.912,121.229 106.134,121.479 106.354,121.71 106.571,121.919 106.784,122.104 106.992,122.262 107.194,122.391 107.388,122.489 107.574,122.554 107.75,122.587 107.915,122.586 v1(108.069,122.55) ; v1(102.688,107.002) 102.743,106.999 102.811,107.027 102.892,107.086 102.986,107.174 103.094,107.289 103.216,107.431 103.351,107.597 103.498,107.784 103.658,107.991 103.83,108.213 104.012,108.45 104.204,108.696 104.404,108.95 104.611,109.208 104.824,109.467 105.04,109.723 105.258,109.973 105.477,110.215 105.695,110.445 105.909,110.659 106.118,110.857 106.32,111.035 106.513,111.19 106.696,111.321 106.866,111.427 107.023,111.506 107.165,111.556 107.291,111.577 107.399,111.569 v1(107.489,111.532) ; v1(103.405,93.317) 103.366,93.279 103.341,93.209 103.331,93.11 103.333,92.981 103.347,92.823 103.371,92.638 103.403,92.427 103.444,92.192 103.49,91.935 103.541,91.658 103.595,91.364 103.65,91.057 103.704,90.738 103.758,90.412 103.808,90.081 103.853,89.749 103.893,89.419 103.926,89.095 103.951,88.779 103.968,88.476 103.975,88.189 103.972,87.92 103.958,87.672 103.933,87.449 103.898,87.251 103.851,87.082 103.793,86.943 103.725,86.835 103.647,86.76 v1(103.559,86.719) ; v1(103.405,106.683) 103.459,106.674 103.53,106.695 103.616,106.745 103.72,106.822 103.839,106.926 103.975,107.054 104.126,107.205 104.293,107.376 104.474,107.564 104.668,107.768 104.873,107.984 105.09,108.209 105.316,108.441 105.548,108.676 105.787,108.911 106.029,109.143 106.272,109.369 106.515,109.586 106.755,109.792 106.99,109.983 107.219,110.158 107.438,110.314 107.647,110.448 107.842,110.56 108.023,110.647 108.187,110.709 108.334,110.744 108.461,110.752 108.568,110.733 v1(108.653,110.686) ; v1(103.514,76.309) 103.666,76.35 103.813,76.427 103.952,76.538 104.085,76.684 104.21,76.862 104.327,77.071 104.437,77.308 104.538,77.571 104.631,77.858 104.716,78.166 104.793,78.491 104.863,78.83 104.927,79.179 104.984,79.536 105.036,79.896 105.083,80.256 105.127,80.612 105.168,80.961 105.208,81.298 105.248,81.622 105.289,81.929 105.332,82.215 105.378,82.478 105.429,82.717 105.485,82.928 105.549,83.109 105.621,83.261 105.702,83.381 105.793,83.468 v1(105.896,83.523) ; v1(103.544,121.321) 103.624,121.443 103.703,121.562 103.783,121.678 103.864,121.792 103.944,121.903 104.025,122.011 104.106,122.116 104.186,122.217 104.267,122.315 104.347,122.409 104.428,122.498 104.508,122.584 104.587,122.665 104.666,122.741 104.745,122.812 104.823,122.879 104.901,122.94 104.977,122.997 105.053,123.048 105.128,123.093 105.203,123.133 105.276,123.167 105.348,123.196 105.419,123.219 105.489,123.236 105.558,123.247 105.625,123.252 105.691,123.252 105.756,123.245 v1(105.819,123.232) ; v1(104.085,93.71) 104.05,93.667 104.033,93.596 104.033,93.496 104.048,93.368 104.078,93.212 104.122,93.031 104.176,92.824 104.241,92.595 104.314,92.344 104.394,92.074 104.478,91.787 104.565,91.487 104.652,91.176 104.739,90.857 104.824,90.533 104.904,90.208 104.978,89.884 105.045,89.565 105.103,89.254 105.151,88.954 105.188,88.669 105.213,88.401 105.225,88.154 105.224,87.929 105.209,87.728 105.18,87.555 105.138,87.411 105.081,87.297 105.011,87.214 v1(104.928,87.163) ; v1(104.085,106.29) 104.138,106.276 104.21,106.289 104.302,106.33 104.412,106.396 104.542,106.487 104.69,106.6 104.857,106.734 105.04,106.887 105.24,107.055 105.454,107.238 105.681,107.431 105.92,107.632 106.169,107.839 106.425,108.048 106.687,108.257 106.951,108.463 107.217,108.662 107.481,108.853 107.742,109.032 107.996,109.198 108.241,109.348 108.476,109.479 108.697,109.591 108.903,109.682 109.092,109.75 109.262,109.794 109.411,109.814 109.538,109.809 109.643,109.778 v1(109.723,109.723) ; v1(104.252,116.976) 104.368,116.964 104.492,116.987 104.626,117.041 104.77,117.127 104.924,117.243 105.088,117.387 105.263,117.556 105.448,117.75 105.643,117.964 105.847,118.196 106.059,118.443 106.28,118.702 106.508,118.969 106.743,119.241 106.982,119.513 107.225,119.784 107.471,120.049 107.718,120.304 107.965,120.547 108.209,120.774 108.451,120.983 108.688,121.17 108.918,121.333 109.141,121.469 109.354,121.578 109.557,121.656 109.748,121.703 109.926,121.719 110.091,121.701 v1(110.24,121.651) ; v1(104.72,94.171) 104.69,94.125 104.68,94.052 104.691,93.953 104.719,93.827 104.766,93.676 104.828,93.5 104.904,93.3 104.992,93.078 105.091,92.837 105.198,92.576 105.312,92.3 105.429,92.011 105.549,91.711 105.669,91.402 105.787,91.089 105.9,90.774 106.008,90.459 106.108,90.149 106.198,89.846 106.277,89.553 106.344,89.274 106.396,89.01 106.434,88.765 106.457,88.541 106.463,88.34 106.453,88.165 106.425,88.017 106.381,87.897 106.32,87.808 v1(106.242,87.749) ; v1(104.72,105.829) 104.771,105.809 104.845,105.815 104.94,105.845 105.057,105.9 105.195,105.976 105.355,106.074 105.534,106.189 105.732,106.322 105.949,106.469 106.181,106.628 106.427,106.796 106.686,106.972 106.954,107.151 107.231,107.333 107.513,107.513 107.798,107.69 108.083,107.86 108.366,108.022 108.643,108.174 108.913,108.312 109.173,108.435 109.42,108.542 109.652,108.63 109.866,108.698 110.061,108.746 110.235,108.772 110.385,108.776 110.511,108.758 110.612,108.717 v1(110.686,108.653) ; v1(105.303,94.697) 105.278,94.648 105.276,94.574 105.297,94.476 105.339,94.354 105.401,94.209 105.481,94.04 105.577,93.849 105.688,93.638 105.812,93.408 105.946,93.16 106.087,92.898 106.235,92.622 106.385,92.336 106.537,92.042 106.687,91.743 106.833,91.441 106.972,91.14 107.104,90.842 107.225,90.55 107.335,90.267 107.43,89.995 107.51,89.739 107.574,89.499 107.619,89.278 107.647,89.08 107.654,88.904 107.643,88.754 107.611,88.631 107.56,88.535 v1(107.489,88.468) ; v1(105.303,105.303) 105.352,105.278 105.426,105.276 105.524,105.297 105.646,105.339 105.791,105.401 105.96,105.481 106.151,105.577 106.362,105.688 106.592,105.812 106.84,105.946 107.102,106.087 107.378,106.235 107.664,106.385 107.958,106.537 108.257,106.687 108.559,106.833 108.86,106.972 109.158,107.104 109.45,107.225 109.733,107.335 110.005,107.43 110.261,107.51 110.501,107.574 110.722,107.619 110.92,107.647 111.096,107.654 111.246,107.643 111.369,107.611 111.465,107.56 v1(111.532,107.489) ; v1(105.819,76.768) 105.967,76.823 106.105,76.914 106.233,77.039 106.351,77.197 106.458,77.386 106.554,77.605 106.639,77.852 106.714,78.124 106.779,78.419 106.833,78.733 106.878,79.064 106.915,79.408 106.944,79.763 106.966,80.123 106.982,80.486 106.994,80.849 107.003,81.208 107.01,81.559 107.016,81.899 107.024,82.225 107.035,82.534 107.049,82.823 107.069,83.09 107.097,83.332 107.132,83.547 107.178,83.735 107.235,83.892 107.304,84.02 107.386,84.116 v1(107.482,84.18) ; v1(105.829,95.28) 105.809,95.229 105.815,95.155 105.845,95.06 105.9,94.943 105.976,94.805 106.074,94.645 106.189,94.466 106.322,94.268 106.469,94.051 106.628,93.819 106.796,93.573 106.972,93.314 107.151,93.046 107.333,92.769 107.513,92.487 107.69,92.202 107.86,91.917 108.022,91.634 108.174,91.357 108.312,91.087 108.435,90.827 108.542,90.58 108.63,90.348 108.698,90.134 108.746,89.939 108.772,89.765 108.776,89.615 108.758,89.489 108.717,89.388 v1(108.653,89.314) ; v1(105.829,104.72) 105.875,104.69 105.948,104.68 106.047,104.691 106.173,104.719 106.324,104.766 106.5,104.828 106.7,104.904 106.922,104.992 107.163,105.091 107.424,105.198 107.7,105.312 107.989,105.429 108.289,105.549 108.598,105.669 108.911,105.787 109.226,105.9 109.541,106.008 109.851,106.108 110.154,106.198 110.447,106.277 110.726,106.344 110.99,106.396 111.235,106.434 111.459,106.457 111.66,106.463 111.835,106.453 111.983,106.425 112.103,106.381 112.192,106.32 v1(112.251,106.242) ; v1(105.896,116.477) 106.009,116.455 106.135,116.464 106.274,116.506 106.426,116.577 106.59,116.677 106.768,116.804 106.959,116.956 107.161,117.13 107.376,117.325 107.602,117.536 107.838,117.761 108.083,117.996 108.336,118.24 108.596,118.487 108.861,118.735 109.13,118.981 109.4,119.22 109.671,119.45 109.94,119.668 110.206,119.87 110.467,120.053 110.721,120.216 110.966,120.356 111.201,120.47 111.424,120.557 111.634,120.615 111.829,120.643 112.007,120.641 112.169,120.608 v1(112.313,120.543) ; v1(106.29,95.915) 106.276,95.862 106.289,95.79 106.33,95.698 106.396,95.588 106.487,95.458 106.6,95.31 106.734,95.143 106.887,94.96 107.055,94.76 107.238,94.546 107.431,94.319 107.632,94.08 107.839,93.831 108.048,93.575 108.257,93.313 108.463,93.049 108.662,92.783 108.853,92.519 109.032,92.258 109.198,92.004 109.348,91.759 109.479,91.524 109.591,91.303 109.682,91.097 109.75,90.908 109.794,90.738 109.814,90.589 109.809,90.462 109.778,90.357 v1(109.723,90.277) ; v1(106.29,104.085) 106.333,104.05 106.404,104.033 106.504,104.033 106.632,104.048 106.788,104.078 106.969,104.122 107.176,104.176 107.405,104.241 107.656,104.314 107.926,104.394 108.213,104.478 108.513,104.565 108.824,104.652 109.143,104.739 109.467,104.824 109.792,104.904 110.116,104.978 110.435,105.045 110.746,105.103 111.046,105.151 111.331,105.188 111.599,105.213 111.846,105.225 112.071,105.224 112.272,105.209 112.445,105.18 112.589,105.138 112.703,105.081 112.786,105.011 v1(112.837,104.928) ; v1(106.683,96.595) 106.674,96.541 106.695,96.47 106.745,96.384 106.822,96.28 106.926,96.161 107.054,96.025 107.205,95.874 107.376,95.707 107.564,95.526 107.768,95.332 107.984,95.127 108.209,94.91 108.441,94.684 108.676,94.452 108.911,94.213 109.143,93.971 109.369,93.728 109.586,93.485 109.792,93.245 109.983,93.01 110.158,92.781 110.314,92.562 110.448,92.353 110.56,92.158 110.647,91.977 110.709,91.813 110.744,91.666 110.752,91.539 110.733,91.432 v1(110.686,91.347) ; v1(106.683,103.405) 106.721,103.366 106.791,103.341 106.89,103.331 107.019,103.333 107.177,103.347 107.362,103.371 107.573,103.403 107.808,103.444 108.065,103.49 108.342,103.541 108.636,103.595 108.943,103.65 109.262,103.704 109.588,103.758 109.919,103.808 110.251,103.853 110.581,103.893 110.905,103.926 111.221,103.951 111.524,103.968 111.811,103.975 112.08,103.972 112.328,103.958 112.551,103.933 112.749,103.898 112.918,103.851 113.057,103.793 113.165,103.725 113.24,103.647 v1(113.281,103.559) ; v1(107.002,97.312) 106.999,97.257 107.027,97.189 107.086,97.108 107.174,97.014 107.289,96.906 107.431,96.784 107.597,96.649 107.784,96.502 107.991,96.342 108.213,96.17 108.45,95.988 108.696,95.796 108.95,95.596 109.208,95.389 109.467,95.176 109.723,94.96 109.973,94.742 110.215,94.523 110.445,94.305 110.659,94.091 110.857,93.882 111.035,93.68 111.19,93.487 111.321,93.304 111.427,93.134 111.506,92.977 111.556,92.835 111.577,92.709 111.569,92.601 v1(111.532,92.511) ; v1(107.002,102.688) 107.036,102.645 107.103,102.613 107.201,102.592 107.329,102.581 107.487,102.578 107.674,102.583 107.887,102.593 108.125,102.609 108.386,102.628 108.667,102.65 108.964,102.672 109.276,102.695 109.598,102.716 109.929,102.735 110.263,102.75 110.598,102.761 110.93,102.766 111.256,102.765 111.572,102.757 111.875,102.742 112.162,102.718 112.429,102.687 112.674,102.648 112.894,102.6 113.086,102.544 113.25,102.48 113.382,102.408 113.482,102.329 113.548,102.243 v1(113.581,102.151) ; v1(107.244,98.059) 107.247,98.004 107.282,97.939 107.349,97.865 107.446,97.78 107.573,97.685 107.726,97.579 107.905,97.462 108.107,97.335 108.329,97.197 108.569,97.05 108.823,96.893 109.088,96.728 109.362,96.556 109.64,96.377 109.919,96.192 110.197,96.004 110.468,95.813 110.731,95.621 110.983,95.428 111.219,95.238 111.437,95.051 111.635,94.869 111.81,94.693 111.959,94.525 112.082,94.366 112.177,94.218 112.242,94.082 112.276,93.959 112.279,93.851 v1(112.251,93.758) ; v1(107.244,101.941) 107.274,101.895 107.337,101.857 107.432,101.825 107.559,101.801 107.716,101.781 107.902,101.766 108.115,101.755 108.354,101.745 108.615,101.737 108.896,101.729 109.194,101.721 109.507,101.711 109.83,101.698 110.16,101.682 110.494,101.662 110.829,101.638 111.159,101.608 111.483,101.573 111.797,101.532 112.097,101.485 112.379,101.432 112.642,101.373 112.881,101.308 113.095,101.238 113.281,101.162 113.436,101.081 113.561,100.996 113.652,100.907 113.709,100.814 v1(113.731,100.72) ; v1(107.408,98.827) 107.416,98.772 107.458,98.712 107.532,98.645 107.638,98.571 107.773,98.489 107.937,98.4 108.127,98.302 108.341,98.197 108.577,98.083 108.83,97.961 109.099,97.832 109.38,97.696 109.67,97.553 109.966,97.404 110.263,97.25 110.558,97.092 110.849,96.93 111.13,96.766 111.4,96.601 111.655,96.437 111.892,96.273 112.107,96.113 112.3,95.956 112.466,95.805 112.605,95.66 112.714,95.523 112.793,95.394 112.84,95.276 112.855,95.168 v1(112.837,95.072)